# Allegro board legacy_test.brd
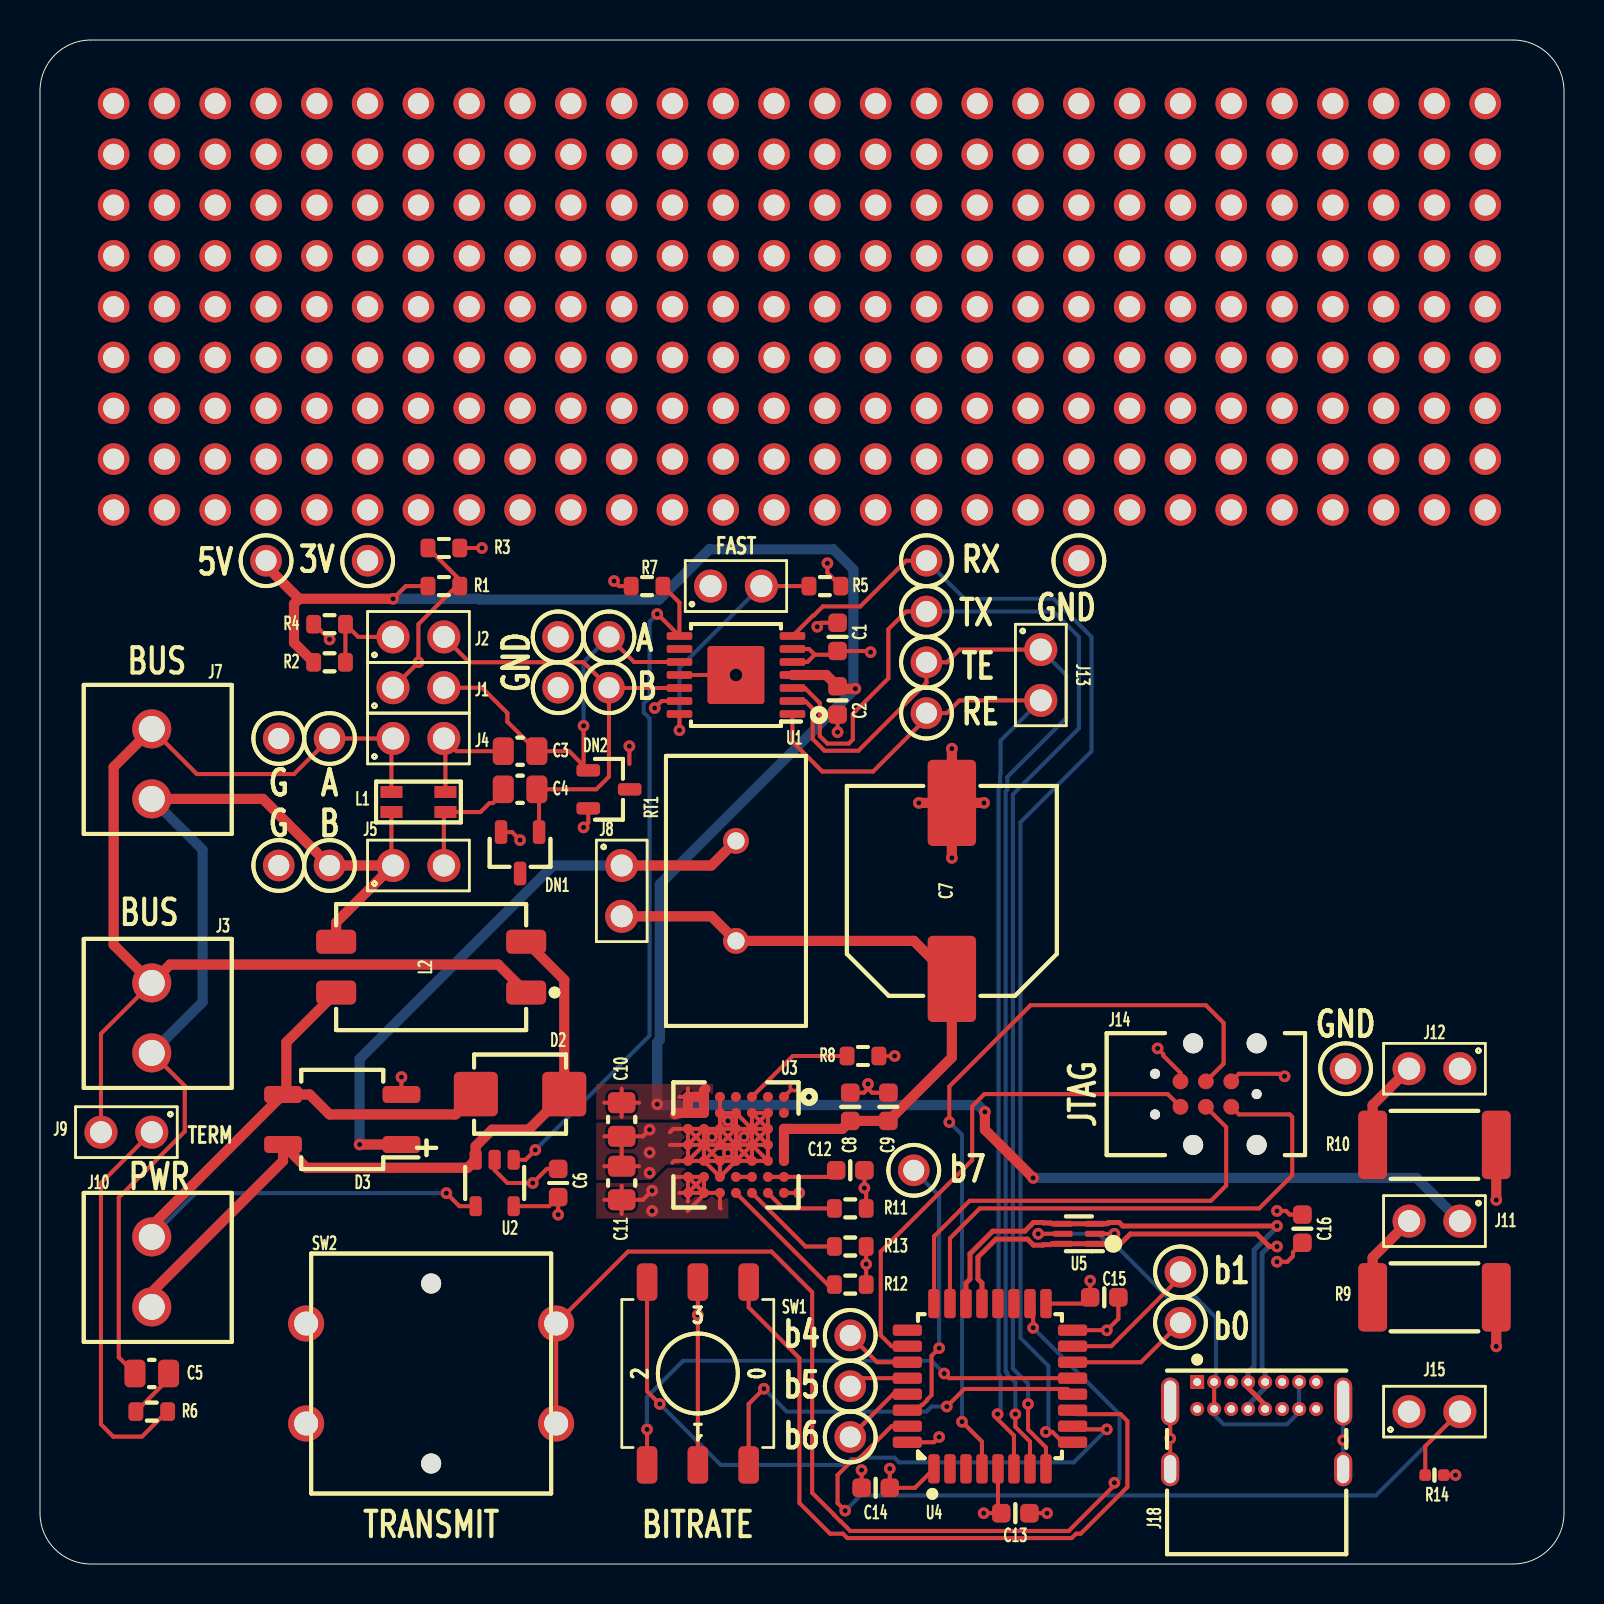
[diagram p0: board, top side]
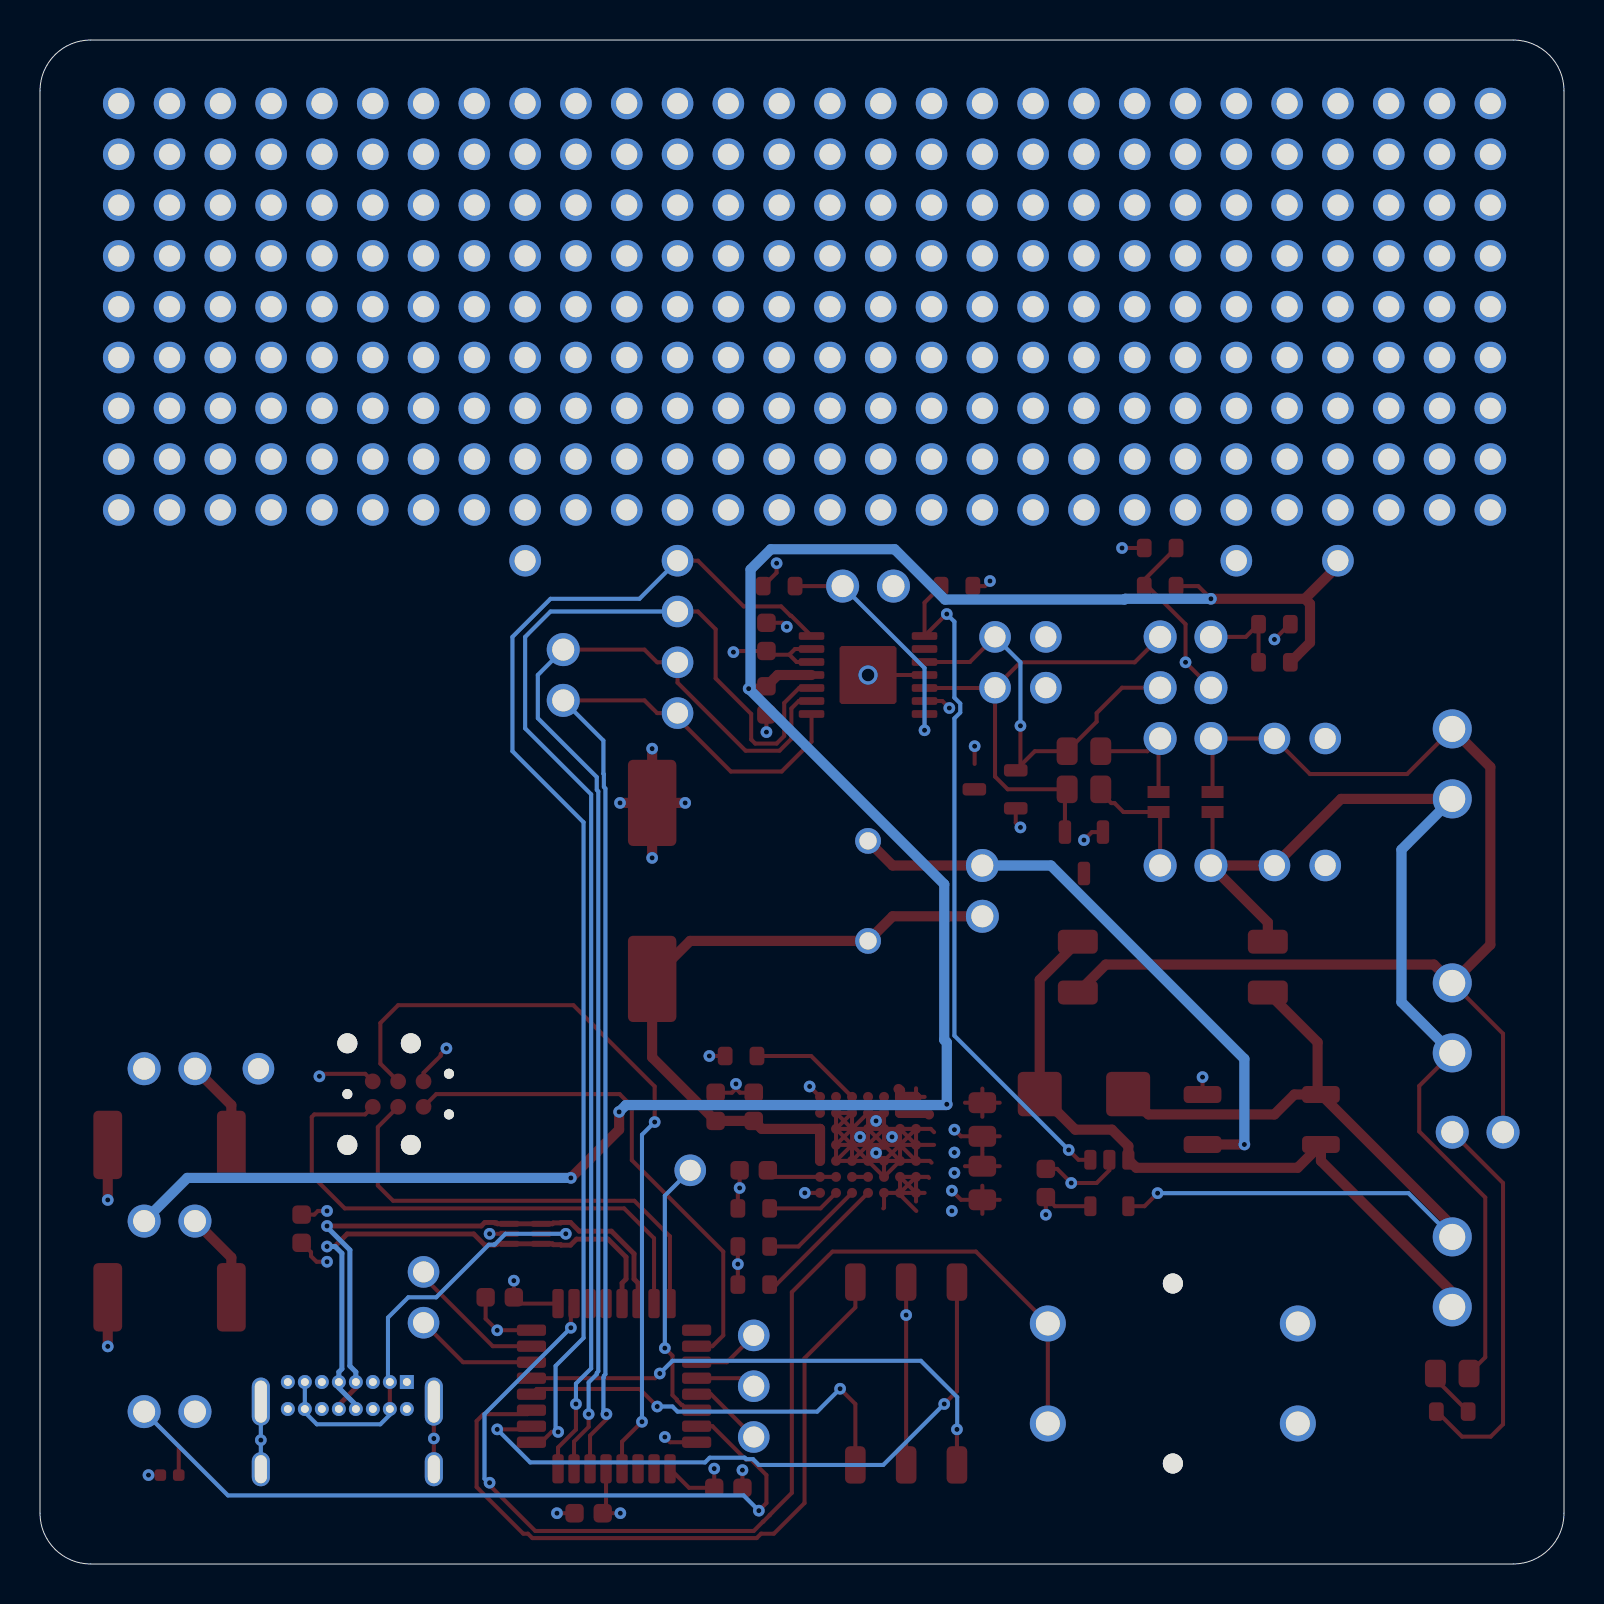
[diagram p1: board, bottom side, seen from below]

Outline 76.2 x 76.2 mm; copper layers: TOP, GPLANE, PPLANE, BOTTOM. Coordinates in mm from the lower left corner of the outline.
Outline path: 0,73.66 arc(0.74,75.46) 2.54,76.2 73.66,76.2 arc(75.46,75.46) 76.2,73.66 76.2,2.54 arc(75.46,0.74) 73.66,0 2.54,0 arc(0.74,0.74) 0,2.54 0,73.66

## Design rules (mm)
constraint set DEFAULT: min track width 0.203
net group USB_DP: nets USB_DM USB_DP

## Placement (name value [footprint] x y rotation side)
C1  0.1uF  [CAPC160X80X90L40N]  39.88 46.36 90 top
C2  0.1uF  [CAPC160X80X90L40N]  39.88 43.18 270 top
C3  1uF  [CAPC200X125X145L50N]  24 40.64 180 top
C4  1uF  [CAPC200X125X145L50N]  24 38.73 180 top
C5  1uF  [CAPC200X125X145L50N]  5.59 9.53 0 top
C6  0.1uF  [CAPC160X80X90L40N]  25.91 19.05 90 top
C7  68uF  [CAPAE1030X1050L350X120N]  45.59 33.66 90 top
C8  1uF  [CAPC160X80X90L40N]  40.51 22.86 90 top
C9  1uF  [CAPC160X80X90L40N]  42.42 22.86 90 top
C10  10uF  [CAPC200X125X145L50N]  29.08 22.23 270 top
C11  22uF  [CAPC200X125X145L50N]  29.08 19.05 90 top
C12  1000pF  [CAPC160X80X90L40N]  40.51 19.68 0 top
C13  0.1uF  [CAPC160X80X90L40N]  48.77 2.54 0 top
C14  0.1uF  [CAPC160X80X90L40N]  41.78 3.81 180 top
C15  0.1uF  [CAPC160X80X90L40N]  53.21 13.34 0 top
C16  0.1uF  [CAPC160X80X90L40N]  63.12 16.76 90 top
D2  SZP6SMB56CAT3G  [DIONM540X362X247L118X208N]  24 23.5 0 top
D3  CDBHM160L-HF  [RECT_SOIC4P250_472X700X270L8-1]  15.11 22.23 90 top
DN1  AZ23C5V1-7-F  [SOT23-3P95_237X111L42X43N]  24 35.56 180 top
DN2  AZ23C5V1-7-F  [SOT23-3P95_237X111L42X43N]  28.45 38.73 270 top
J1  -  [61300211121]  18.92 43.81 0 top
J2  -  [61300211121]  18.92 46.36 0 top
J3  691214110002  [CON_691214110002_WURTH]  5.59 27.3 270 top
J4  -  [61300211121]  18.92 41.27 0 top
J5  -  [61300211121]  18.92 34.92 0 top
J6  -  [61300211121]  34.8 48.9 0 top
J7  691214110002  [CON_691214110002_WURTH]  5.59 40 270 top
J8  -  [61300211121]  29.08 33.66 270 top
J9  -  [61300211121]  4.32 21.59 180 top
J10  691214110002  [CON_691214110002_WURTH]  5.59 14.61 270 top
J11  -  [61300211121]  69.72 17.14 180 top
J12  -  [61300211121]  69.72 24.77 180 top
J13  -  [61300211121]  50.04 44.45 270 top
J14  TC2030  [TAG_TC2030]  58.29 23.5 180 top
J15  -  [61300211121]  69.72 7.62 0 top
J18  USB4085-GF-A  [GCT_USB4085-GF-A]  60.83 5.08 270 top
L1  744232101  [IND_744232101_WURTH]  18.92 38.1 0 top
L2  744222  [IND_744222_WURTH]  19.56 29.84 90 top
NOREF  -  [unnamed]  67.18 73.03 0 top
NOREF#2  -  [unnamed]  13.84 65.41 0 top
NOREF#3  -  [unnamed]  18.92 60.33 0 top
NOREF#4  -  [unnamed]  72.26 57.78 0 top
NOREF#5  -  [unnamed]  57.02 55.24 0 top
NOREF#6  -  [unnamed]  13.84 73.03 0 top
NOREF#7  -  [unnamed]  46.86 67.94 0 top
NOREF#8  -  [unnamed]  46.86 73.03 0 top
NOREF#9  -  [unnamed]  62.1 52.7 0 top
NOREF#10  -  [unnamed]  8.76 52.7 0 top
NOREF#11  -  [unnamed]  44.32 70.48 0 top
NOREF#12  -  [unnamed]  31.62 67.94 0 top
NOREF#13  -  [unnamed]  54.48 57.78 0 top
NOREF#14  -  [unnamed]  57.02 73.03 0 top
NOREF#15  -  [unnamed]  49.4 52.7 0 top
NOREF#16  -  [unnamed]  67.18 70.48 0 top
NOREF#17  -  [unnamed]  3.68 55.24 0 top
NOREF#18  -  [unnamed]  46.86 62.87 0 top
NOREF#19  -  [unnamed]  62.1 73.03 0 top
NOREF#20  -  [unnamed]  36.7 60.33 0 top
NOREF#21  -  [unnamed]  41.78 52.7 0 top
NOREF#22  -  [unnamed]  41.78 70.48 0 top
NOREF#23  -  [unnamed]  8.76 62.87 0 top
NOREF#24  -  [#2]  2.54 0 90 top
NOREF#25  -  [unnamed]  59.56 70.48 0 top
NOREF#26  -  [unnamed]  54.48 70.48 0 top
NOREF#27  -  [#2]  0 2.54 0 top
NOREF#28  -  [unnamed]  6.22 73.03 0 top
NOREF#29  -  [unnamed]  29.08 67.94 0 top
NOREF#30  -  [unnamed]  8.76 60.33 0 top
NOREF#31  -  [unnamed]  8.76 73.03 0 top
NOREF#32  -  [unnamed]  29.08 57.78 0 top
NOREF#33  -  [unnamed]  18.92 65.41 0 top
NOREF#34  -  [unnamed]  3.68 62.87 0 top
NOREF#35  -  [unnamed]  39.24 55.24 0 top
NOREF#36  -  [unnamed]  44.32 62.87 0 top
NOREF#37  -  [unnamed]  36.7 65.41 0 top
NOREF#38  -  [unnamed]  59.56 60.33 0 top
NOREF#39  -  [unnamed]  24 57.78 0 top
NOREF#40  -  [unnamed]  39.24 52.7 0 top
NOREF#41  -  [unnamed]  18.92 73.03 0 top
NOREF#42  -  [unnamed]  59.56 55.24 0 top
NOREF#43  -  [unnamed]  49.4 67.94 0 top
NOREF#44  -  [unnamed]  18.92 57.78 0 top
NOREF#45  -  [unnamed]  54.48 55.24 0 top
NOREF#46  -  [unnamed]  3.68 57.78 0 top
NOREF#47  -  [unnamed]  24 55.24 0 top
NOREF#48  -  [unnamed]  31.62 73.03 0 top
NOREF#49  -  [unnamed]  24 62.87 0 top
NOREF#50  -  [unnamed]  41.78 73.03 0 top
NOREF#51  -  [unnamed]  29.08 73.03 0 top
NOREF#52  -  [unnamed]  49.4 65.41 0 top
NOREF#53  -  [unnamed]  67.18 67.94 0 top
NOREF#54  -  [unnamed]  24 67.94 0 top
NOREF#55  -  [unnamed]  44.32 55.24 0 top
NOREF#56  -  [unnamed]  6.22 67.94 0 top
NOREF#57  -  [unnamed]  16.38 57.78 0 top
NOREF#58  -  [unnamed]  72.26 60.33 0 top
NOREF#59  -  [unnamed]  41.78 55.24 0 top
NOREF#60  -  [unnamed]  13.84 55.24 0 top
NOREF#61  -  [unnamed]  57.02 70.48 0 top
NOREF#62  -  [unnamed]  34.16 67.94 0 top
NOREF#63  -  [unnamed]  16.38 73.03 0 top
NOREF#64  -  [unnamed]  31.62 62.87 0 top
NOREF#65  -  [unnamed]  34.16 65.41 0 top
NOREF#66  -  [unnamed]  69.72 52.7 0 top
NOREF#67  -  [unnamed]  3.68 60.33 0 top
NOREF#68  -  [unnamed]  26.54 70.48 0 top
NOREF#69  -  [unnamed]  8.76 65.41 0 top
NOREF#70  -  [unnamed]  49.4 73.03 0 top
NOREF#71  -  [unnamed]  54.48 60.33 0 top
NOREF#72  -  [unnamed]  24 70.48 0 top
NOREF#73  -  [unnamed]  41.78 65.41 0 top
NOREF#74  -  [unnamed]  26.54 73.03 0 top
NOREF#75  -  [unnamed]  13.84 62.87 0 top
NOREF#76  -  [unnamed]  34.16 60.33 0 top
NOREF#77  -  [unnamed]  21.46 52.7 0 top
NOREF#78  -  [unnamed]  69.72 65.41 0 top
NOREF#79  -  [unnamed]  62.1 55.24 0 top
NOREF#80  -  [unnamed]  51.94 55.24 0 top
NOREF#81  -  [unnamed]  64.64 52.7 0 top
NOREF#82  -  [unnamed]  31.62 57.78 0 top
NOREF#83  -  [unnamed]  13.84 57.78 0 top
NOREF#84  -  [unnamed]  24 60.33 0 top
NOREF#85  -  [unnamed]  67.18 62.87 0 top
NOREF#86  -  [unnamed]  51.94 62.87 0 top
NOREF#87  -  [unnamed]  49.4 70.48 0 top
NOREF#88  -  [unnamed]  59.56 52.7 0 top
NOREF#89  -  [unnamed]  11.3 57.78 0 top
NOREF#90  -  [unnamed]  51.94 70.48 0 top
NOREF#91  -  [unnamed]  41.78 62.87 0 top
NOREF#92  -  [unnamed]  6.22 57.78 0 top
NOREF#93  -  [unnamed]  31.62 52.7 0 top
NOREF#94  -  [unnamed]  29.08 65.41 0 top
NOREF#95  -  [unnamed]  24 73.03 0 top
NOREF#96  -  [unnamed]  67.18 65.41 0 top
NOREF#97  -  [unnamed]  69.72 62.87 0 top
NOREF#98  -  [unnamed]  36.7 52.7 0 top
NOREF#99  -  [unnamed]  64.64 65.41 0 top
NOREF#100  -  [unnamed]  26.54 52.7 0 top
NOREF#101  -  [unnamed]  46.86 57.78 0 top
NOREF#102  -  [unnamed]  69.72 73.03 0 top
NOREF#103  -  [unnamed]  46.86 65.41 0 top
NOREF#104  -  [unnamed]  3.68 67.94 0 top
NOREF#105  -  [unnamed]  16.38 52.7 0 top
NOREF#106  -  [unnamed]  57.02 62.87 0 top
NOREF#107  -  [unnamed]  44.32 52.7 0 top
NOREF#108  -  [unnamed]  57.02 60.33 0 top
NOREF#109  -  [unnamed]  64.64 70.48 0 top
NOREF#110  -  [unnamed]  44.32 57.78 0 top
NOREF#111  -  [unnamed]  36.7 62.87 0 top
NOREF#112  -  [unnamed]  46.86 70.48 0 top
NOREF#113  -  [unnamed]  51.94 60.33 0 top
NOREF#114  -  [unnamed]  69.72 55.24 0 top
NOREF#115  -  [unnamed]  62.1 60.33 0 top
NOREF#116  -  [unnamed]  62.1 57.78 0 top
NOREF#117  -  [unnamed]  64.64 57.78 0 top
NOREF#118  -  [unnamed]  69.72 60.33 0 top
NOREF#119  -  [unnamed]  6.22 55.24 0 top
NOREF#120  -  [unnamed]  54.48 52.7 0 top
NOREF#121  -  [unnamed]  13.84 52.7 0 top
NOREF#122  -  [unnamed]  31.62 60.33 0 top
NOREF#123  -  [unnamed]  26.54 60.33 0 top
NOREF#124  -  [unnamed]  57.02 57.78 0 top
NOREF#125  -  [unnamed]  24 52.7 0 top
NOREF#126  -  [unnamed]  29.08 62.87 0 top
NOREF#127  -  [unnamed]  67.18 60.33 0 top
NOREF#128  -  [unnamed]  18.92 70.48 0 top
NOREF#129  -  [unnamed]  34.16 70.48 0 top
NOREF#130  -  [unnamed]  54.48 65.41 0 top
NOREF#131  -  [unnamed]  31.62 70.48 0 top
NOREF#132  -  [unnamed]  39.24 70.48 0 top
NOREF#133  -  [unnamed]  62.1 65.41 0 top
NOREF#134  -  [unnamed]  72.26 70.48 0 top
NOREF#135  -  [unnamed]  62.1 70.48 0 top
NOREF#136  -  [unnamed]  72.26 62.87 0 top
NOREF#137  -  [unnamed]  72.26 55.24 0 top
NOREF#138  -  [unnamed]  13.84 67.94 0 top
NOREF#139  -  [unnamed]  11.3 67.94 0 top
NOREF#140  -  [unnamed]  59.56 62.87 0 top
NOREF#141  -  [unnamed]  51.94 73.03 0 top
NOREF#142  -  [unnamed]  51.94 52.7 0 top
NOREF#143  -  [unnamed]  21.46 57.78 0 top
NOREF#144  -  [unnamed]  69.72 70.48 0 top
NOREF#145  -  [unnamed]  21.46 55.24 0 top
NOREF#146  -  [unnamed]  18.92 52.7 0 top
NOREF#147  -  [unnamed]  6.22 65.41 0 top
NOREF#148  -  [unnamed]  72.26 65.41 0 top
NOREF#149  -  [unnamed]  67.18 55.24 0 top
NOREF#150  -  [unnamed]  31.62 65.41 0 top
NOREF#151  -  [unnamed]  39.24 60.33 0 top
NOREF#152  -  [unnamed]  6.22 52.7 0 top
NOREF#153  -  [unnamed]  18.92 67.94 0 top
NOREF#154  -  [unnamed]  34.16 73.03 0 top
NOREF#155  -  [unnamed]  16.38 55.24 0 top
NOREF#156  -  [unnamed]  16.38 65.41 0 top
NOREF#157  -  [unnamed]  62.1 67.94 0 top
NOREF#158  -  [unnamed]  64.64 73.03 0 top
NOREF#159  -  [unnamed]  69.72 57.78 0 top
NOREF#160  -  [unnamed]  31.62 55.24 0 top
NOREF#161  -  [unnamed]  49.4 57.78 0 top
NOREF#162  -  [unnamed]  11.3 73.03 0 top
NOREF#163  -  [unnamed]  6.22 62.87 0 top
NOREF#164  -  [unnamed]  36.7 73.03 0 top
NOREF#165  -  [unnamed]  41.78 60.33 0 top
NOREF#166  -  [unnamed]  6.22 60.33 0 top
NOREF#167  -  [unnamed]  59.56 73.03 0 top
NOREF#168  -  [unnamed]  54.48 73.03 0 top
NOREF#169  -  [unnamed]  44.32 73.03 0 top
NOREF#170  -  [unnamed]  26.54 62.87 0 top
NOREF#171  -  [unnamed]  39.24 62.87 0 top
NOREF#172  -  [unnamed]  64.64 55.24 0 top
NOREF#173  -  [unnamed]  36.7 57.78 0 top
NOREF#174  -  [unnamed]  26.54 55.24 0 top
NOREF#175  -  [unnamed]  46.86 60.33 0 top
NOREF#176  -  [unnamed]  26.54 57.78 0 top
NOREF#177  -  [unnamed]  21.46 60.33 0 top
NOREF#178  -  [unnamed]  34.16 55.24 0 top
NOREF#179  -  [unnamed]  39.24 57.78 0 top
NOREF#180  -  [unnamed]  64.64 60.33 0 top
NOREF#181  -  [unnamed]  64.64 67.94 0 top
NOREF#182  -  [unnamed]  29.08 55.24 0 top
NOREF#183  -  [unnamed]  44.32 67.94 0 top
NOREF#184  -  [unnamed]  67.18 52.7 0 top
NOREF#185  -  [unnamed]  21.46 73.03 0 top
NOREF#186  -  [unnamed]  8.76 57.78 0 top
NOREF#187  -  [unnamed]  11.3 62.87 0 top
NOREF#188  -  [unnamed]  64.64 62.87 0 top
NOREF#189  -  [unnamed]  11.3 70.48 0 top
NOREF#190  -  [unnamed]  62.1 62.87 0 top
NOREF#191  -  [unnamed]  46.86 52.7 0 top
NOREF#192  -  [unnamed]  16.38 60.33 0 top
NOREF#193  -  [unnamed]  8.76 70.48 0 top
NOREF#194  -  [unnamed]  44.32 65.41 0 top
NOREF#195  -  [unnamed]  29.08 70.48 0 top
NOREF#196  -  [unnamed]  36.7 70.48 0 top
NOREF#197  -  [unnamed]  3.68 52.7 0 top
NOREF#198  -  [unnamed]  57.02 52.7 0 top
NOREF#199  -  [unnamed]  51.94 67.94 0 top
NOREF#200  -  [unnamed]  34.16 62.87 0 top
NOREF#201  -  [unnamed]  3.68 73.03 0 top
NOREF#202  -  [unnamed]  24 65.41 0 top
NOREF#203  -  [unnamed]  59.56 57.78 0 top
NOREF#204  -  [unnamed]  16.38 67.94 0 top
NOREF#205  -  [unnamed]  49.4 60.33 0 top
NOREF#206  -  [unnamed]  39.24 65.41 0 top
NOREF#207  -  [unnamed]  36.7 55.24 0 top
NOREF#208  -  [unnamed]  59.56 65.41 0 top
NOREF#209  -  [unnamed]  36.7 67.94 0 top
NOREF#210  -  [unnamed]  29.08 52.7 0 top
NOREF#211  -  [unnamed]  69.72 67.94 0 top
NOREF#212  -  [unnamed]  54.48 67.94 0 top
NOREF#213  -  [unnamed]  8.76 67.94 0 top
NOREF#214  -  [unnamed]  11.3 52.7 0 top
NOREF#215  -  [unnamed]  21.46 65.41 0 top
NOREF#216  -  [unnamed]  18.92 55.24 0 top
NOREF#217  -  [unnamed]  21.46 62.87 0 top
NOREF#218  -  [unnamed]  46.86 55.24 0 top
NOREF#219  -  [unnamed]  51.94 57.78 0 top
NOREF#220  -  [unnamed]  34.16 57.78 0 top
NOREF#221  -  [unnamed]  49.4 55.24 0 top
NOREF#222  -  [unnamed]  8.76 55.24 0 top
NOREF#223  -  [unnamed]  72.26 67.94 0 top
NOREF#224  -  [unnamed]  11.3 55.24 0 top
NOREF#225  -  [unnamed]  13.84 70.48 0 top
NOREF#226  -  [unnamed]  26.54 65.41 0 top
NOREF#227  -  [unnamed]  72.26 73.03 0 top
NOREF#228  -  [unnamed]  41.78 67.94 0 top
NOREF#229  -  [unnamed]  13.84 60.33 0 top
NOREF#230  -  [unnamed]  34.16 52.7 0 top
NOREF#231  -  [unnamed]  16.38 62.87 0 top
NOREF#232  -  [unnamed]  26.54 67.94 0 top
NOREF#233  -  [unnamed]  72.26 52.7 0 top
NOREF#234  -  [unnamed]  6.22 70.48 0 top
NOREF#235  -  [unnamed]  3.68 70.48 0 top
NOREF#236  -  [unnamed]  57.02 67.94 0 top
NOREF#237  -  [unnamed]  16.38 70.48 0 top
NOREF#238  -  [unnamed]  59.56 67.94 0 top
NOREF#239  -  [unnamed]  51.94 65.41 0 top
NOREF#240  -  [unnamed]  39.24 67.94 0 top
NOREF#241  -  [unnamed]  11.3 60.33 0 top
NOREF#242  -  [unnamed]  29.08 60.33 0 top
NOREF#243  -  [unnamed]  3.68 65.41 0 top
NOREF#244  -  [unnamed]  21.46 70.48 0 top
NOREF#245  -  [unnamed]  21.46 67.94 0 top
NOREF#246  -  [unnamed]  41.78 57.78 0 top
NOREF#247  -  [unnamed]  44.32 60.33 0 top
NOREF#248  -  [unnamed]  54.48 62.87 0 top
NOREF#249  -  [unnamed]  11.3 65.41 0 top
NOREF#250  -  [unnamed]  49.4 62.87 0 top
NOREF#251  -  [unnamed]  57.02 65.41 0 top
NOREF#252  -  [unnamed]  67.18 57.78 0 top
NOREF#253  -  [unnamed]  18.92 62.87 0 top
NOREF#254  -  [unnamed]  39.24 73.03 0 top
R1  100k  [RESC160X80X55L25N]  20.19 48.9 0 top
R2  100k  [RESC160X80X55L25N]  14.48 45.09 0 top
R3  100k  [RESC160X80X55L25N]  20.19 50.8 0 top
R4  100k  [RESC160X80X55L25N]  14.48 46.99 180 top
R5  47k  [RESC160X80X55L25N]  39.24 48.9 0 top
R6  120  [RESC160X80X55L25N]  5.59 7.62 0 top
R7  47k  [RESC160X80X55L25N]  30.35 48.9 0 top
R8  0  [RESC160X80X55L25N]  41.15 25.4 0 top
R9  22  [RESC640X320X70L65N]  69.72 13.34 0 top
R10  10Ohms  [RESC640X320X70L65N]  69.72 20.95 0 top
R11  35.7k  [RESC160X80X55L25N]  40.51 17.78 0 top
R12  47.5k  [RESC160X80X55L25N]  40.51 13.97 0 top
R13  78.7k  [RESC160X80X55L25N]  40.51 15.88 0 top
R14  47k  [RESC100X50X40L25N]  69.72 4.45 0 top
RT1  PTCEL13R501RBE  [THRMRB500W60L1350T700H1700]  34.8 33.66 270 top
SW1  CS-7-14TB  [SW_CS-7-14TB_NIDEC]  32.89 9.53 0 top
SW2  B3F-5000  [SW_B3F-5000_OMRON]  19.56 9.53 0 top
TP1  BLU  [CON_5117_KEYSTONE]  44.32 47.62 0 top
TP2  BLU  [CON_5117_KEYSTONE]  44.32 42.55 0 top
TP3  BLU  [CON_5117_KEYSTONE]  44.32 45.09 0 top
TP4  WHT  [CON_5002_KEYSTONE]  28.45 46.36 0 top
TP5  YEL  [CON_5004_KEYSTONE]  28.45 43.81 0 top
TP6  WHT  [CON_5002_KEYSTONE]  14.48 41.27 0 top
TP7  YEL  [CON_5004_KEYSTONE]  14.48 34.92 0 top
TP8  BLU  [CON_5117_KEYSTONE]  44.32 50.16 0 top
TP9  BLK  [CON_5001_KEYSTONE]  11.94 34.92 0 top
TP10  BLK  [CON_5001_KEYSTONE]  11.94 41.27 0 top
TP11  BLK  [CON_5001_KEYSTONE]  25.91 46.36 0 top
TP12  BLK  [CON_5001_KEYSTONE]  65.28 24.77 0 top
TP13  BLK  [CON_5001_KEYSTONE]  51.94 50.16 0 top
TP14  BLK  [CON_5001_KEYSTONE]  25.91 43.81 0 top
TP15  RED  [CON_5000_KEYSTONE]  11.3 50.16 0 top
TP16  RED  [CON_5000_KEYSTONE]  16.38 50.16 0 top
TP17  BLU  [CON_5117_KEYSTONE]  57.02 12.06 0 top
TP18  BLU  [CON_5117_KEYSTONE]  57.02 14.61 0 top
TP19  BLU  [CON_5117_KEYSTONE]  40.51 11.43 0 top
TP20  BLU  [CON_5117_KEYSTONE]  40.51 8.89 0 top
TP21  BLU  [CON_5117_KEYSTONE]  40.51 6.35 0 top
TP22  BLU  [CON_5117_KEYSTONE]  43.69 19.68 0 top
U1  MAX13451EAUD+T  [SOP15P65_500X637X110L60X24T2-1]  34.8 44.45 90 top
U2  LT1716IS5#TRMPBF  [SOT23-5P95_280X100L40X40N]  22.73 19.05 180 top
U3  LTM8078IY#PBF  [LGA49CP80_7X7_625X625X242L50N]  34.8 20.95 180 top
U4  STM32L412KBT6  [QFP32P80_900X900X160L60X37N]  47.5 8.89 0 top
U5  USBLC6-2P6  [DIOSOFL6P50_160X160X60L40X26]  51.94 16.51 90 top

## Library data of the parts
C1-C6 C8-C16 = CAP_SHORT
C7 = CAP_POL_SHORT
D2 = DIODE TVS BI-DIR
D3 = BRIDGE_SHKY_12
DN1 DN2 = DIODE_DUAL_ZENER_CA_KKJ
J1 J2 J4-J6 J8 J9 J11-J13 J15 = JUMP 1x2
J3 J7 J10 = HEADER 2
J14 = CON6
J18 = CON_USB4085_GCT
L1 = CHOKE CM14
L2 = CHOKE CM12
R1-R14 = RES
RT1 = PTC
SW1 = SW_CS-7-14TB_NIDEC
SW2 = SW_PB_4PIN
TP1-TP22 = TEST HOLE
U1 = IC_MAX13451_MAXIM
U2 = IC_LT1716_AD
U3 = IC_LTM8078_AD
U4 = IC_STM32L412KB_ST
U5 = IC_USBLC6-2_ST

## Footprints (pads in the part's own frame, mm; a bottom-side part is the same pattern mirrored in y, then rotated)
61300211121
  round 1.65 hole 1.1: 1(-1.27,0) 2(1.27,0)
CAPAE1030X1050L350X120N
  rrect 4.31x2.42 smd: 1(-4.4,0) 2(4.4,0)
CAPC160X80X90L40N
  rrect 0.92x0.93 smd: 1(-0.705,0) 2(0.705,0)
CAPC200X125X145L50N
  rrect 1.05x1.38 smd: 1(-0.84,0) 2(0.84,0)
CON_5000_KEYSTONE
  round 1.58 hole 1.05: 1(0,0)
CON_5001_KEYSTONE
  round 1.58 hole 1.05: 1(0,0)
CON_5002_KEYSTONE
  round 1.58 hole 1.05: 1(0,0)
CON_5004_KEYSTONE
  round 1.58 hole 1.05: 1(0,0)
CON_5117_KEYSTONE
  round 1.58 hole 1.05: 1(0,0)
CON_691214110002_WURTH
  round 1.95 hole 1.3: 1(-1.75,0) 2(1.75,0)
DIONM540X362X247L118X208N
  rrect 2.2x2.22 smd: 1(-2.21,0) 2(2.21,0)
DIOSOFL6P50_160X160X60L40X26
  rrect 0.3x0.99 smd: 1(-0.5,-0.805) 2(0,-0.805) 3(0.5,-0.805) 4(0.5,0.805) 5(0,0.805) 6(-0.5,0.805)
GCT_USB4085-GF-A
  oval 2.405x0.905 hole 2.1x0.6 unplated: (-3.04,4.325) (-3.04,-4.325)
  oval 1.705x0.905 hole 1.4x0.6 unplated: (0.34,4.325) (0.34,-4.325)
  rect 0.697x0.697 hole 0.393: A1(-4.02,-2.975)
  round 0.697 hole 0.393: A4(-4.02,-2.125) A5(-4.02,-1.275) A6(-4.02,-0.425) A7(-4.02,0.425) A8(-4.02,1.275) A9(-4.02,2.125) A12(-4.02,2.975) B1(-2.67,2.975) B4(-2.67,2.125) B5(-2.67,1.275) B6(-2.67,0.425) B7(-2.67,-0.425) B8(-2.67,-1.275) B9(-2.67,-2.125) B12(-2.67,-2.975)
IND_744222_WURTH
  rrect 1.2x2 smd: 1(-1.27,-4.75) 2(1.27,-4.75) 3(1.27,4.75) 4(-1.27,4.75)
IND_744232101_WURTH
  rect 1.1x0.6 smd: 1(-1.35,0.5) 2(1.35,0.5) 3(1.35,-0.5) 4(-1.35,-0.5)
LGA49CP80_7X7_625X625X242L50N
  round 0.5 smd: A1(-2.4,-2.4) A2(-2.4,-1.6) A3(-2.4,-0.8) A4(-2.4,0) A5(-2.4,0.8) A6(-2.4,1.6) A7(-2.4,2.4) B1(-1.6,-2.4) B2(-1.6,-1.6) B3(-1.6,-0.8) B4(-1.6,0) B5(-1.6,0.8) B6(-1.6,1.6) B7(-1.6,2.4) C1(-0.8,-2.4) C2(-0.8,-1.6) C3(-0.8,-0.8) C4(-0.8,0) C5(-0.8,0.8) C6(-0.8,1.6) C7(-0.8,2.4) D1(0,-2.4) D2(0,-1.6) D3(0,-0.8) D4(0,0) D5(0,0.8) D6(0,1.6) D7(0,2.4) E1(0.8,-2.4) E2(0.8,-1.6) E3(0.8,-0.8) E4(0.8,0) E5(0.8,0.8) E6(0.8,1.6) E7(0.8,2.4) F1(1.6,-2.4) F2(1.6,-1.6) F3(1.6,-0.8) F4(1.6,0) F5(1.6,0.8) F6(1.6,1.6) F7(1.6,2.4) G1(2.4,-2.4) G2(2.4,-1.6) G3(2.4,-0.8) G4(2.4,0) G5(2.4,0.8) G6(2.4,1.6) G7(2.4,2.4)
QFP32P80_900X900X160L60X37N
  rrect 0.57x1.46 smd: 1(-2.8,-4.13) 2(-2,-4.13) 3(-1.2,-4.13) 4(-0.4,-4.13) 5(0.4,-4.13) 6(1.2,-4.13) 7(2,-4.13) 8(2.8,-4.13) 17(2.8,4.13) 18(2,4.13) 19(1.2,4.13) 20(0.4,4.13) 21(-0.4,4.13) 22(-1.2,4.13) 23(-2,4.13) 24(-2.8,4.13)
  rrect 1.46x0.57 smd: 9(4.13,-2.8) 10(4.13,-2) 11(4.13,-1.2) 12(4.13,-0.4) 13(4.13,0.4) 14(4.13,1.2) 15(4.13,2) 16(4.13,2.8) 25(-4.13,2.8) 26(-4.13,2) 27(-4.13,1.2) 28(-4.13,0.4) 29(-4.13,-0.4) 30(-4.13,-1.2) 31(-4.13,-2) 32(-4.13,-2.8)
RECT_SOIC4P250_472X700X270L8-1
  rrect 0.85x1.89 smd: 1(-1.25,-2.96) 2(1.25,-2.96) 3(1.25,2.96) 4(-1.25,2.96)
RESC100X50X40L25N
  rrect 0.58x0.58 smd: 1(-0.46,0) 2(0.46,0)
RESC160X80X55L25N
  rrect 0.74x0.93 smd: 1(-0.795,0) 2(0.795,0)
RESC640X320X70L65N
  rrect 1.44x3.42 smd: 1(-3.09,0) 2(3.09,0)
SOP15P65_500X637X110L60X24T2-1
  rrect 0.39x1.28 smd: 1(-1.95,-2.825) 2(-1.3,-2.825) 3(-0.65,-2.825) 4(0,-2.825) 5(0.65,-2.825) 6(1.3,-2.825) 7(1.95,-2.825) 8(1.95,2.825) 9(1.3,2.825) 10(0.65,2.825) 11(0,2.825) 12(-0.65,2.825) 13(-1.3,2.825) 14(-1.95,2.825)
  rrect 2.9x2.85 smd: 15(0,0)
SOT23-3P95_237X111L42X43N
  rrect 0.62x1.18 smd: 1(-0.95,-1.035) 2(0.95,-1.035) 3(0,1.035)
SOT23-5P95_280X100L40X40N
  rrect 0.61x0.99 smd: 1(-0.95,-1.16) 2(0,-1.16) 3(0.95,-1.16) 4(0.95,1.16) 5(-0.95,1.16)
SW_B3F-5000_OMRON
  round 1 hole 1.8 unplated: (0,4.5) (0,-4.5)
  round 1.8 hole 1.2: 1(-6.25,2.5) 2(6.25,2.5) 3(-6.25,-2.5) 4(6.25,-2.5)
SW_CS-7-14TB_NIDEC
  rrect 1.03x1.87 smd: 1(-2.54,-4.57) 2(0,-4.57) 3(2.54,-4.57) 4(2.54,4.57) 5(0,4.57) 6(-2.54,4.57)
TAG_TC2030
  round 1 hole 2.38 unplated: (-2.54,2.54) (-2.54,-2.54) (0.635,2.54) (0.635,-2.54)
  round 0.5 hole 0.99 unplated: (-2.54,0) (2.54,1.016) (2.54,-1.016)
  round 0.787 smd: 1(-1.27,-0.635) 2(-1.27,0.635) 3(0,-0.635) 4(0,0.635) 5(1.27,-0.635) 6(1.27,0.635)
THRMRB500W60L1350T700H1700
  round 1.29 hole 0.86: 1(-2.5,0) 2(2.5,0)
unnamed
  round 1.58 hole 1.05: 1(0,0)

## Nets
GND: C1.2 C2.2 C6.2 C7.2 C8.2 C9.2 C10.2 C11.2 C12.2 C13.2 C14.2 C15.2 C16.2 D3.2 DN1.2 DN2.2 J6.1 J14.5 J18.A1 J18.A12 J18.B1 J18.B12 R3.2 R4.2 R9.2 R10.2 R11.2 R12.2 R13.2 R14.2 SW1.2 SW1.5(C_2) SW2.1 SW2.3 TP9.1 TP10.1 TP11.1 TP12.1 TP13.1 TP14.1 U1.11 U1.15 U2.2 U3.A1 U3.A7 U3.B2 U3.B3 U3.B4 U3.B5 U3.C2 U3.C3 U3.C4 U3.C5 U3.D2 U3.D3 U3.D4 U3.D5 U3.E1 U3.E2 U3.E3 U3.E4 U3.E5 U3.E6 U3.F3 U3.F4 U3.F5 U3.G3 U3.G4 U3.G5 U4.16 U4.32 U5.2
V5: C2.1 C10.1 J11.1 R1.1 R2.1 TP15.1 U1.4(VDRV) U3.F1 U3.F2 U3.G1 U3.G2
VCC: C1.1 C6.1 C11.1 C13.1 C14.1 C15.1 C16.1 J12.1 J14.1 J15.1 R5.2 R7.1 R8.2 TP16.1 U1.5 U1.6 U1.13 U2.5 U3.E7 U3.F6 U3.F7 U3.G6 U3.G7 U4.1 U4.5 U4.17
A_IN: C3.1 DN2.1 J1.2 TP4.1 U1.10
B_IN: C4.1 DN1.1 J2.2 TP5.1 U1.12
BUS_A: J3.1 J4.1 J7.1 J9.2 L1.1 L2.1 TP6.1
BUS_B: C5.1 J3.2 J5.1 J7.2 L1.4 L2.3 TP7.1
INV: R7.2 U1.8 U2.1(OUT)
RXD: TP8.1 U1.7 U4.9
RXE: J13.2 TP2.1 U1.1 U4.6
SW1: SW1.6 U4.10
SW2: SW1.4 U4.11
SW3: SW1.3 U4.12
SW4: SW1.1 U4.13
TXD: TP1.1 U1.3 U4.8
TXE: J13.1 TP3.1 U1.2 U4.7
USB_DM: J18.A7 J18.B7 U4.21 U5.1 U5.6
USB_DP: J18.A6 J18.B6 U4.22 U5.3 U5.4
VRAW: C7.1 C8.1 C9.1 J8.2 RT1.2 U3.A3 U3.A4 U3.A5
XMIT: SW2.2 SW2.4 U4.18
N00354: R12.1 U3.D7
N00391: R13.1 U3.C7
N00494: C12.1 U3.A6 U3.B6
N00628: R11.1 U3.B7
N06582: U3.C6 U3.D6(OMC)
N44102: D2.2 D3.4 J10.2 L2.2 U2.3
N44111: D2.1 D3.3(AC2) J10.1 L2.4 U2.4
N44224: D3.1 J8.1 RT1.1
N46803: J6.2 R5.1 U1.14
N47498: J2.1 R2.2 R4.1
N47631: J1.1 R1.2 R3.1
N50317: J11.2 R9.1
N50410: J12.2 R10.1
N62411: C4.2 J5.2 L1.3
N62421: C3.2 J4.2 L1.2
N63315: C5.2 R6.1
N63319: J9.1 R6.2
N73563: R8.1 U3.C1
N86511: J14.2 U4.23
N86521: J14.3 U4.4
N86531: J14.4 U4.24
N86555: J14.6 U4.26(SWO)
N86603: J15.2 R14.1 U4.31
N95055: J18.A4 J18.A9 J18.B4 J18.B9 U5.5(VB)
N97303: TP22.1 U4.30
N97309: TP21.1 U4.29
N97315: TP20.1 U4.28
N97321: TP19.1 U4.27
N97327: TP18.1 U4.15
N97333: TP17.1 U4.14

Pads without a net: DN1 3; DN2 3; J18 A5 A8 B5 B8; NOREF 1; NOREF#2 1; NOREF#3 1; NOREF#4 1; NOREF#5 1; NOREF#6 1; NOREF#7 1; NOREF#8 1; NOREF#9 1; NOREF#10 1; NOREF#11 1; NOREF#12 1; NOREF#13 1; NOREF#14 1; NOREF#15 1; NOREF#16 1; NOREF#17 1; NOREF#18 1; NOREF#19 1; NOREF#20 1; NOREF#21 1; NOREF#22 1; NOREF#23 1; NOREF#25 1; NOREF#26 1; NOREF#28 1; NOREF#29 1; NOREF#30 1; NOREF#31 1; NOREF#32 1; NOREF#33 1; NOREF#34 1; NOREF#35 1; NOREF#36 1; NOREF#37 1; NOREF#38 1; NOREF#39 1; NOREF#40 1; NOREF#41 1; NOREF#42 1; NOREF#43 1; NOREF#44 1; NOREF#45 1; NOREF#46 1; NOREF#47 1; NOREF#48 1; NOREF#49 1; NOREF#50 1; NOREF#51 1; NOREF#52 1; NOREF#53 1; NOREF#54 1; NOREF#55 1; NOREF#56 1; NOREF#57 1; NOREF#58 1; NOREF#59 1; NOREF#60 1; NOREF#61 1; NOREF#62 1; NOREF#63 1; NOREF#64 1; NOREF#65 1; NOREF#66 1; NOREF#67 1; NOREF#68 1; NOREF#69 1; NOREF#70 1; NOREF#71 1; NOREF#72 1; NOREF#73 1; NOREF#74 1; NOREF#75 1; NOREF#76 1; NOREF#77 1; NOREF#78 1; NOREF#79 1; NOREF#80 1; NOREF#81 1; NOREF#82 1; NOREF#83 1; NOREF#84 1; NOREF#85 1; NOREF#86 1; NOREF#87 1; NOREF#88 1; NOREF#89 1; NOREF#90 1; NOREF#91 1; NOREF#92 1; NOREF#93 1; NOREF#94 1; NOREF#95 1; NOREF#96 1; NOREF#97 1; NOREF#98 1; NOREF#99 1; NOREF#100 1; NOREF#101 1; NOREF#102 1; NOREF#103 1; NOREF#104 1; NOREF#105 1; NOREF#106 1; NOREF#107 1; NOREF#108 1; NOREF#109 1; NOREF#110 1; NOREF#111 1; NOREF#112 1; NOREF#113 1; NOREF#114 1; NOREF#115 1; NOREF#116 1; NOREF#117 1; NOREF#118 1; NOREF#119 1; NOREF#120 1; NOREF#121 1; NOREF#122 1; NOREF#123 1; NOREF#124 1; NOREF#125 1; NOREF#126 1; NOREF#127 1; NOREF#128 1; NOREF#129 1; NOREF#130 1; NOREF#131 1; NOREF#132 1; NOREF#133 1; NOREF#134 1; NOREF#135 1; NOREF#136 1; NOREF#137 1; NOREF#138 1; NOREF#139 1; NOREF#140 1; NOREF#141 1; NOREF#142 1; NOREF#143 1; NOREF#144 1; NOREF#145 1; NOREF#146 1; NOREF#147 1; NOREF#148 1; NOREF#149 1; NOREF#150 1; NOREF#151 1; NOREF#152 1; NOREF#153 1; NOREF#154 1; NOREF#155 1; NOREF#156 1; NOREF#157 1; NOREF#158 1; NOREF#159 1; NOREF#160 1; NOREF#161 1; NOREF#162 1; NOREF#163 1; NOREF#164 1; NOREF#165 1; NOREF#166 1; NOREF#167 1; NOREF#168 1; NOREF#169 1; NOREF#170 1; NOREF#171 1; NOREF#172 1; NOREF#173 1; NOREF#174 1; NOREF#175 1; NOREF#176 1; NOREF#177 1; NOREF#178 1; NOREF#179 1; NOREF#180 1; NOREF#181 1; NOREF#182 1; NOREF#183 1; NOREF#184 1; NOREF#185 1; NOREF#186 1; NOREF#187 1; NOREF#188 1; NOREF#189 1; NOREF#190 1; NOREF#191 1; NOREF#192 1; NOREF#193 1; NOREF#194 1; NOREF#195 1; NOREF#196 1; NOREF#197 1; NOREF#198 1; NOREF#199 1; NOREF#200 1; NOREF#201 1; NOREF#202 1; NOREF#203 1; NOREF#204 1; NOREF#205 1; NOREF#206 1; NOREF#207 1; NOREF#208 1; NOREF#209 1; NOREF#210 1; NOREF#211 1; NOREF#212 1; NOREF#213 1; NOREF#214 1; NOREF#215 1; NOREF#216 1; NOREF#217 1; NOREF#218 1; NOREF#219 1; NOREF#220 1; NOREF#221 1; NOREF#222 1; NOREF#223 1; NOREF#224 1; NOREF#225 1; NOREF#226 1; NOREF#227 1; NOREF#228 1; NOREF#229 1; NOREF#230 1; NOREF#231 1; NOREF#232 1; NOREF#233 1; NOREF#234 1; NOREF#235 1; NOREF#236 1; NOREF#237 1; NOREF#238 1; NOREF#239 1; NOREF#240 1; NOREF#241 1; NOREF#242 1; NOREF#243 1; NOREF#244 1; NOREF#245 1; NOREF#246 1; NOREF#247 1; NOREF#248 1; NOREF#249 1; NOREF#250 1; NOREF#251 1; NOREF#252 1; NOREF#253 1; NOREF#254 1; U1 9; U3 A2 B1 D1; U4 2 3 19 20 25

## Via types
v1: diameter 0.584, hole 0.254, TOP to BOTTOM, 82 vias
v2: diameter 0.965, hole 0.635, TOP to BOTTOM, 1 via

## Routing (per net, layer and track width the routed paths; a pad name or vN(x,y) marks a point on that pad's centre or on a via; arc(x,y) is an arc through that point)
GND: length 167.1
  TOP w0.203: v1(30.48,21.72) 30.15,21.39 C10.2 ; v1(34.4,22.15) U3.D2 ; U3.D2 U3.D3 ; U3.D2 U3.E2 ; U3.D2 U3.C3 ; U3.D2 U3.D3 ; U3.G3 U3.G4 ; U3.G3 U3.F4 ; U3.G3 U3.F3 ; U3.G3 31.66,21.76 31.5,21.59 ; U3.G4 U3.F3 ; U3.G4 U3.F4 ; U3.G4 31.5,20.95 ; U3.G4 U3.G5 ; U3.A1 v1(37.72,23.88) ; U3.F3 U3.F4 ; U3.F3 v1(33.6,21.35) ; U3.F3 U3.E3 ; C9.2 41.61,23.57 41.4,23.77 ; v1(44.96,6.35) 44.7,6.09 U4.32 ; U3.F5 U3.G5 ; U3.F5 U3.F4 ; U3.F5 U3.E6 ; U3.F5 U3.E5 ; U3.F5 U3.E4 ; U3.G5 U3.F4 ; U3.G5 31.71,20.15 31.62,20.07 ; U3.F4 U3.E4 ; U3.F4 U3.E3 ; U3.F4 U3.E5 ; U3.E6 U3.E5 ; U3.E6 U3.D5 ; U3.E5 v1(34.4,20.55) ; U3.E5 U3.D5 ; 29.47,40 v1(29.47,40.89) ; 41.4,23.77 41.2,23.57 C8.2 ; 41.4,23.77 v1(41.4,24) ; U3.E2 U3.D3 ; U3.E2 U3.E1 ; U3.E2 U3.E3 ; U3.D3 U3.E3 ; U3.D3 U3.C3 ; U3.D3 U3.D4 ; U3.D3 U3.E4 ; v1(27.18,36.83) 27.41,37.06 DN2.2 ; R14.2 v1(70.78,4.45) ; U3.C3 U3.B2 ; U3.C3 U3.C4 ; U3.C3 U3.B4 ; U3.C3 U3.C2 ; U3.C3 U3.B3 ; U3.C3 v1(35.2,21.36) U3.D4 ; U3.B2 U3.C2 ; U3.B2 U3.B3 ; v1(41.08,4.69) C14.2 ; v1(34.4,20.55) U3.E4 ; v1(34.4,20.55) U3.D5 ; v1(34.4,20.55) U3.D4 ; C16.2 62.48,17.47 62.3,17.65 v1(61.85,17.65) ; U3.E3 U3.E4 ; U3.E3 U3.D4 ; U3.C4 U3.B4 ; U3.C4 U3.D5 ; U3.C4 U3.D4 ; U3.C4 U3.C5 ; U3.C4 U3.B5 ; U3.C4 U3.B3 ; U3.E4 U3.D4 ; U3.B4 U3.B5 ; U3.B4 U3.B3 ; 28.21,19.89 C11.2 ; C11.2 29.08,20.59 ; C11.2 29.95,19.89 ; v1(24,36.2) 23.6,36.6 DN1.2 ; R13.2 v1(41.31,14.99) R12.2 ; C12.2 v1(41.22,18.8) 41.31,18.71 R11.2 ; C1.2 39.06,47.06 v1(38.86,46.86) ; U3.C2 U3.B3 ; 29.08,20.68 C10.2 ; C10.2 28.21,21.39 ; U3.D4 U3.C5 ; U3.D4 U3.D5 ; U3.C5 U3.D5 ; U3.C5 U3.B5 ; U2.2 22.73,19.68 23.37,19.05 v1(24.64,19.05) 25.34,19.76 C6.2 ; R4.2 13.72,46.99 v1(14.48,46.23) ; D3.2 v1(18.07,24.34) ; 56.51,8.12 v1(56.51,6.27) 56.51,4.74 ; SW1.2 v1(32.89,12.45) SW1.5 ; R3.2 v1(22.1,50.8) ; U3.A7 v1(37.96,18.55) ; C13.2 v1(50.35,2.54) ; U1.11 v2(34.8,44.45) ; C15.2 53.92,12.26 v1(53.34,11.68) 53.33,11.69 U4.16 ; C2.2 v1(39.88,41.6) ; v1(55.88,25.78) 56.16,25.5 56.16,25.42 57.02,24.56 J14.5 ; U5.2 v1(53.72,16.51)
  TOP w0.508: C7.2 v1(43.94,38.06) ; C7.2 v1(45.59,35.31) ; C7.2 v1(45.59,40.77) ; C7.2 v1(47.2,38.06) ; R10.2 v1(72.81,18.2) ; R9.2 v1(72.81,10.88)
  GPLANE w0.203: J18.A12 64.34,9.1 ; J18.A12 63.81,8.57 ; J18.A12 63.81,9.63 ; J18.B1 63.81,8.28 ; J18.B1 63.81,7.22 ; J18.B1 64.34,7.75 ; 13.31,5.95 SW2.3 ; SW2.3 12.23,7.02 ; SW2.3 13.31,8.1 ; SW2.3 14.39,7.02 ; 11.06,34.92 TP9.1 ; TP9.1 11.94,34.04 ; TP9.1 11.94,35.81 ; TP9.1 12.82,34.92 ; 12.23,12.03 SW2.1 ; SW2.1 13.31,13.1 ; SW2.1 14.39,12.03 ; SW2.1 13.31,10.95 ; TP13.1 51.94,51.05 ; TP13.1 52.82,50.16 ; TP13.1 51.06,50.16 ; TP13.1 51.94,49.28 ; TP10.1 12.82,41.27 ; TP10.1 11.94,42.16 ; TP10.1 11.94,40.39 ; TP10.1 11.06,41.27 ; 57.86,7.22 J18.B12 ; J18.B12 57.33,7.75 ; J18.B12 57.86,8.28 ; 64.4,24.77 TP12.1 ; TP12.1 66.16,24.77 ; TP12.1 65.28,25.65 ; TP12.1 65.28,23.88 ; 33.53,47.89 J6.1 ; J6.1 32.52,48.9 ; J6.1 34.53,48.9 ; J6.1 33.53,49.9 ; TP14.1 26.79,43.81 ; TP14.1 25.03,43.81 ; TP14.1 25.91,44.7 ; TP14.1 25.91,42.93 ; TP11.1 25.91,47.24 ; TP11.1 26.79,46.36 ; TP11.1 25.03,46.36 ; TP11.1 25.91,45.47 ; 57.33,9.1 J18.A1 ; J18.A1 57.86,8.57 ; J18.A1 57.86,9.63
  BOTTOM w0.203: 65.16,8.12 v1(65.16,6.19) 65.16,4.74
  vias: v1(30.48,20.57) v1(30.48,19.56)
V5: length 123.2
  TOP w0.203: 32.4,23.78 U3.G1 31.97,23.36 ; R1.1 18.29,48.9 v1(17.65,48.26) ; 29.08,22.36 C10.1 ; C10.1 29.95,23.06 ; C10.1 29.08,23.77 ; C10.1 28.21,23.06 ; TP15.1 11.3,49.91
  TOP w0.508: U3.F1 33.2,23.67 33.27,23.75 ; U3.F1 U3.G1 U3.G2 ; U3.F1 U3.F2 U3.G2 ; v1(49.66,19.3) 47.24,21.72 v1(47.24,22.61) ; R2.1 12.7,46.07 12.7,48.01 12.95,48.26 ; U1.4 39.31,44.45 C2.1 40,43.77 v1(40.77,43.77) ; U3.G2 31.83,22.55 31.75,22.48 ; 12.95,48.26 v1(17.65,48.26) ; 12.95,48.26 11.3,49.91
  BOTTOM w0.508: v1(47.24,22.61) 46.9,22.95 30.9,22.95 v1(30.86,22.99) 30.86,26.08 30.99,26.21 30.99,33.99 v1(40.77,43.77) 40.67,43.86 40.67,49.72 39.66,50.74 33.46,50.74 30.95,48.22 21.98,48.22 21.94,48.26 v1(17.65,48.26) ; v1(49.66,19.3) 68.83,19.3 70.99,17.14
VCC: length 53.2
  TOP w0.203: U4.17 52.19,13.02 C15.1 v1(52.51,14.17) ; v1(61.85,15.11) 62.37,15.11 62.65,15.39 62.65,15.59 63.11,16.06 C16.1 ; v1(42.49,4.77) C14.1 43.75,3.81 U4.1 ; 28.21,18.21 C11.1 ; C11.1 30.15,18.21 v1(30.61,18.67) ; C11.1 29.08,18.91 ; C11.1 29.08,17.51 ; v1(25.91,17.47) C6.1 25.45,17.89 U2.5 ; R8.2 v1(42.73,25.4) ; U3.G6 U3.F7 ; U3.G6 U3.F6 ; U3.G6 31.8,19.36 31.75,19.3 ; U3.G6 U3.G7 ; U3.F7 U3.F6 ; U3.F7 U3.E7 34,17.82 34.04,17.78 ; U3.F7 33.2,18.47 32.39,17.65 ; U3.F7 U3.G7 ; U3.F6 U3.G7 ; v1(39.37,50.04) 39.37,49.56 R5.2 ; U1.5 38.37,45.1 38.73,45.47 ; 38.73,45.47 39.69,45.47 C1.1 41.47,45.65 v1(41.53,45.59) ; 38.73,45.47 38.45,45.75 U1.6 ; U1.13 31.09,43.15 v1(30.73,42.8) ; J14.1 59.94,24.51 62.11,24.51 v1(62.23,24.38) ; U3.G7 31.97,18.55 ; U3.G7 32.4,18.13 ; v1(47.18,2.54) C13.1 47.9,2.7 U4.5 ; R7.1 28.96,48.9 v1(28.7,49.15)
  PPLANE w0.203: 16.38,49.28 TP16.1 ; TP16.1 17.26,50.16 ; TP16.1 16.38,51.05 ; TP16.1 15.5,50.16 ; J15.1 68.45,8.62 ; J15.1 68.45,6.62 ; J15.1 69.46,7.62 ; J15.1 67.45,7.62 ; 70.99,23.76 70.99,24.77 ; 70.99,24.77 69.99,24.77 ; 70.99,24.77 70.99,25.77 ; 70.99,24.77 72,24.77
  vias: v1(30.61,17.65)
A_IN: length 20.2
  TOP w0.203: U1.10 29.7,45.1 TP4.1 ; 27.18,39.92 26.46,40.64 C3.1 23.37,42.11 23.37,42.55 22.1,43.81 J1.2 ; 27.18,39.92 DN2.1 ; 27.18,39.92 v1(27.18,41.91)
  BOTTOM w0.203: TP4.1 27.18,45.09 v1(27.18,41.91)
B_IN: length 23.3
  TOP w0.203: DN1.1 24.95,38.63 C4.1 27.81,38.73 28.45,39.37 TP5.1 ; TP5.1 28.46,43.8 U1.12 ; TP5.1 27.18,45.09 21.46,45.09 J2.2
BUS_A: length 58.9
  TOP w0.203: L1.1 17.57,41.19 J4.1 TP6.1 12.7,39.5 7.85,39.5 J7.1 ; J9.2 3.05,26.52 J3.1
  TOP w0.508: J7.1 3.68,39.85 3.68,30.96 J3.1 6.5,29.97 22.91,29.97 L2.1
BUS_B: length 54.4
  TOP w0.203: J5.1 17.57,35.01 L1.4 ; J3.2 7.24,23.9 7.24,21.63 3.94,18.33 3.94,10.34 C5.1
  TOP w0.508: J7.2 11.15,38.25 TP7.1 J5.1 14.81,32.08 L2.3
  BOTTOM w0.508: J7.2 8.13,35.71 8.13,28.09 J3.2
INV: length 35.3
  TOP w0.203: R7.2 31.97,48.07 U1.8 30.87,47.5 v1(30.86,47.5) ; U2.1 24.27,20.21 v1(24.76,20.7)
  BOTTOM w0.203: v1(24.76,20.7) 30.48,26.42 30.48,42.28 30.19,42.57 30.19,43.03 30.48,43.32 30.48,47.12 v1(30.86,47.5)
RXD: length 61.5
  TOP w0.203: U4.9 51.13,6.09 50.62,6.6 v1(50.29,6.6) ; TP8.1 43.3,50.16 41.02,47.88 39.14,47.88 38.67,47.41 38.64,47.41 37.63,46.4 U1.7
  BOTTOM w0.203: v1(50.29,6.6) 50.42,6.73 50.42,9.91 49.02,11.3 49.02,37.08 52.58,40.64 52.58,46.36 50.67,48.26 46.23,48.26 TP8.1
RXE: length 55.8
  TOP w0.203: v1(47.88,7.49) 47.88,7.24 48.7,6.42 U4.6 ; J13.2 45.98,43.18 45.34,42.55 TP2.1 44.32,42.29 41.66,39.62 39.12,39.62 37.62,41.12 U1.1
  BOTTOM w0.203: v1(47.88,7.49) 48.03,7.65 48.03,9.31 48.01,9.34 48.01,9.41 47.93,9.48 47.93,38.78 48.01,38.85 48.01,39.49 48.03,39.52 48.03,41.17 J13.2
SW1: length 32.7
  TOP w0.203: U4.10 51.79,6.73 v1(53.34,6.73) ; v1(30.99,8) 30.35,8.64 SW1.6
  BOTTOM w0.203: v1(30.99,8) 34.04,4.95 40.26,4.95 40.55,5.24 40.89,5.24 40.96,5.32 42.71,5.32 42.95,5.08 51.69,5.08 v1(53.34,6.73)
SW2: length 36.5
  TOP w0.203: SW1.4 35.43,12.83 37.97,10.29 37.97,3.05 39.5,1.52 40.14,1.52 40.37,1.3 51.58,1.3 51.8,1.52 52.04,1.52 54.37,3.85 54.37,7.15 54.03,7.49 51.83,7.49 U4.11
SW3: length 20.6
  TOP w0.203: v1(45.34,7.87) 46.22,8.75 51.37,8.75 U4.12 ; SW1.3 35.43,8 v1(36.2,8.76)
  BOTTOM w0.203: v1(36.2,8.76) 37.34,7.62 44.32,7.62 44.58,7.87 v1(45.34,7.87)
SW4: length 25.8
  TOP w0.203: v1(45.21,9.53) 45.45,9.29 U4.13 ; v1(30.35,6.73) SW1.1
  BOTTOM w0.203: v1(45.21,9.53) 44.58,10.16 32.16,10.16 30.34,8.34 30.34,6.74 v1(30.35,6.73)
TXD: length 65.5
  TOP w0.203: TP1.1 43.3,47.62 42.42,46.74 42.42,44.28 40.64,42.5 40.64,41.22 40.44,41.02 39.37,41.02 38.99,41.4 38.99,43.05 38.24,43.8 U1.3 ; v1(49.4,8) 49.4,6.72 50.3,5.83 U4.8
  BOTTOM w0.203: TP1.1 50.67,47.62 51.94,46.36 51.94,41.78 48.64,38.48 48.64,9.78 49.4,9.02 v1(49.4,8)
TXE: length 60.3
  TOP w0.203: J13.1 45.98,45.72 45.34,45.09 TP3.1 44.32,44.07 40.92,40.67 39.22,40.67 38.63,41.25 38.63,42.77 38.26,43.15 U1.2 ; U4.7 49.5,6.12 48.77,6.85 v1(48.77,7.49)
  BOTTOM w0.203: v1(48.77,7.49) 48.77,9.08 48.36,9.49 48.36,9.56 48.29,9.63 48.29,38.63 48.36,38.7 48.36,39.34 51.31,42.29 51.31,44.45 J13.1
USB_DM: length 27.5
  TOP w0.247: v1(61.85,15.88) 61.47,15.88 60.84,16.5 54.52,16.5 53.96,15.94 53.49,15.94 53.46,15.97 53.37,15.97 53.33,16.01 U5.1 U5.6 50.58,16.01 50.54,15.97 50.17,15.97 50.15,15.94 49.68,15.94 49.37,16.24 47.8,16.24 46.9,15.34 46.9,14.25 47.1,14.05 U4.21
  BOTTOM w0.247: J18.B7 60.41,7.96 61.26,8.81 J18.A7 61.26,9.6 61.11,9.75 61.11,15.54 61.44,15.88 v1(61.85,15.88)
USB_DP: length 28.8
  TOP w0.247: U4.22 46.3,14.05 46.5,14.25 46.5,15.51 47.63,16.64 49.24,16.64 49.68,17.08 50.15,17.08 50.17,17.05 50.54,17.05 50.58,17.01 U5.4 U5.3 53.33,17.01 53.37,17.05 53.46,17.05 53.49,17.08 53.96,17.08 54.13,16.9 v1(61.85,16.9) ; J18.A6 60.41,8.81 61.26,7.96 J18.B6
  BOTTOM w0.247: v1(61.85,16.9) 61.85,16.84 60.71,15.7 60.71,9.9 60.41,9.6 J18.A6
VRAW: length 33.2
  TOP w0.508: J8.2 33.57,32.39 RT1.2 43.69,31.15 C7.1 45.59,25.33 C9.1 C8.1 40.11,21.76 U3.A3 U3.A4 U3.A5
XMIT: length 58.1
  TOP w0.203: U4.18 49.66,12.86 v1(49.66,11.81) ; v1(53.72,4.06) 53.72,3.94 51.43,1.65 40.51,1.65 40.04,2.12 40.03,2.12 39.71,2.44 39.71,2.45 38.61,3.56 38.61,13.59 36.58,15.62 29.4,15.62 SW2.2 SW2.4
  BOTTOM w0.203: v1(49.66,11.81) 53.97,7.49 53.97,4.27 53.77,4.06 v1(53.72,4.06)
N00354: length 6.8
  TOP w0.203: R12.1 39.38,13.97 U3.D7
N00391: length 5.2
  TOP w0.203: U3.C7 38.28,15.88 R13.1
N00494: length 3.5
  TOP w0.203: U3.B6 U3.A6 39.48,19.36 C12.1
N00628: length 3.6
  TOP w0.203: U3.B7 37.17,17.78 R11.1
N06582: length 0.8
  TOP w0.203: U3.C6 U3.D6
N44102: length 35.7
  TOP w0.508: L2.2 26.21,29.21 D2.2 24.44,21.72 22.61,21.72 21.78,20.89 U2.3 21.39,19.81 13.32,19.81 D3.4 12.15,20.15 5.59,13.59 J10.2
N44111: length 43.9
  TOP w0.203: v1(20.32,18.54) 20.97,17.89 U2.4
  TOP w0.508: L2.4 12.32,26.09 12.32,23.64 D3.3 ; D3.3 13.48,23.47 14.48,22.48 20.78,22.48 D2.1 ; D3.3 5.59,16.91 J10.1
  BOTTOM w0.203: v1(20.32,18.54) 7.77,18.54 J10.1
N44224: length 29.7
  TOP w0.508: RT1.1 33.57,34.92 J8.1 ; D3.1 v1(15.98,20.98)
  BOTTOM w0.508: v1(15.98,20.98) 15.98,25.25 25.65,34.92 J8.1
N46803: length 12.1
  TOP w0.203: U1.14 v1(31.97,41.69) ; R5.1 J6.2
  BOTTOM w0.203: v1(31.97,41.69) 31.97,44.8 J6.2
N47498: length 4.5
  TOP w0.203: J2.1 15.91,46.36 R4.1 R2.2
N47631: length 9.1
  TOP w0.203: R3.1 20.99,49.21 R1.2 20.83,48.9 18.92,46.99 v1(18.92,45.09) J1.1
N50317: length 4.6
  TOP w0.508: J11.2 66.63,15.33 R9.1
N50410: length 4.6
  TOP w0.508: R10.1 66.63,22.95 J12.2
N62411: length 6.2
  TOP w0.203: C4.2 23.16,38.57 22.64,38.05 22.47,38.05 22.03,37.6 L1.3 20.19,37.52 J5.2
N62421: length 5.8
  TOP w0.203: 20.27,41.19 J4.2 ; 20.27,41.19 L1.2 ; 20.27,41.19 20.83,40.64 C3.2
N63315: length 2.6
  TOP w0.203: R6.1 6.43,9.25 C5.2
N63319: length 19.8
  TOP w0.203: J9.1 3.05,19.05 3.05,6.98 3.67,6.37 5.1,6.37 6.35,7.62 R6.2
N73563: length 5.6
  TOP w0.203: U3.C1 37.64,25.4 R8.1
N86511: length 27.9
  TOP w0.203: U4.23 45.5,16.29 46.99,17.78 60.96,17.78 62.61,19.43 62.61,22.35 62.48,22.48 59.94,22.48 J14.2
N86521: length 38.8
  TOP w0.203: v1(45.47,22.1) 45.47,23.88 49.53,27.94 58.29,27.94 59.18,27.05 59.18,25.02 J14.3 ; v1(46.1,7.11) 47.1,6.12 U4.4
  BOTTOM w0.203: v1(46.1,7.11) 46.1,21.46 v1(45.47,22.1)
N86531: length 23.4
  TOP w0.203: J14.4 59.31,21.84 59.31,18.92 58.55,18.16 46.48,18.16 44.7,16.38 44.7,13.03 U4.24
N86555: length 25.8
  TOP w0.203: J14.6 56.39,23.5 47.22,23.5 46.61,22.89 46.61,20.19 42.04,15.62 42.04,11.43 42.58,10.89 U4.26
N86603: length 43.1
  TOP w0.203: R14.1 69.26,5.89 70.99,7.62 ; U4.31 42.58,6.89 40.9,5.21 40.65,5.21 39.88,4.45 39.88,3.05 v1(40.26,2.67)
  BOTTOM w0.203: 70.99,7.62 66.8,3.43 41.02,3.43 v1(40.26,2.67)
N95055: length 23
  TOP w0.203: U5.5 v1(49.91,16.51) ; J18.A4 J18.B9
  BOTTOM w0.203: J18.A9 J18.B4 62.96,7.59 62.36,6.98 59.18,6.98 58.71,7.46 J18.B9 ; v1(49.91,16.51) 52.93,16.51 53.45,15.99 53.47,15.99 53.49,15.96 53.76,15.96 56.39,13.34 57.78,13.34 58.8,12.32 58.8,9.19 J18.A4
N97303: length 13.5
  TOP w0.203: v1(44.96,10.79) 44.58,10.41 44.58,8.44 44.35,8.22 44.35,8.18 44.12,7.95 44.09,7.95 43.82,7.69 U4.30
  BOTTOM w0.203: v1(44.96,10.79) 44.96,18.41 TP22.1
N97309: length 3.7
  TOP w0.203: U4.29 42.65,8.49 TP21.1
N97315: length 3
  TOP w0.203: U4.28 40.91,9.29 TP20.1
N97321: length 3.4
  TOP w0.203: U4.27 41.85,10.09 TP19.1
N97327: length 7.1
  TOP w0.203: TP18.1 57.02,14.35 53.56,10.89 U4.15
N97333: length 6.2
  TOP w0.203: TP17.1 55.05,10.09 U4.14

## Copper pours and planes (outline as drawn; the poured copper is in the pictures)
GND on TOP: 27.81,22.23 33.65,22.23 33.65,24 34.42,24 34.42,22.99 36.7,22.99 36.7,19.81 36.58,19.68 34.42,19.68 34.42,18.92 33.65,18.92 33.65,19.81 31.37,19.81 30.61,19.05 27.81,19.05
GND on GPLANE: 0.51,73.66 1.1,75.1 2.54,75.69 73.66,75.69 75.1,75.1 75.69,73.66 75.69,2.54 75.1,1.1 73.66,0.51 2.54,0.51 1.1,1.1 0.51,2.54
V5 on TOP: 27.81,24 27.81,22.23 33.65,22.23 33.65,24
VCC on TOP: 27.81,19.05 30.61,19.05 31.37,19.81 33.65,19.81 33.65,18.92 34.42,18.92 34.42,17.27 27.81,17.27
VCC on PPLANE: 0.51,73.66 1.1,75.1 2.54,75.69 73.66,75.69 75.1,75.1 75.69,73.66 75.69,2.54 75.1,1.1 73.66,0.51 2.54,0.51 1.1,1.1 0.51,2.54

## Text on the board
Ref Des/Silkscreen Top: TERM | FAST | BUS | PWR | TRANSMIT | BITRATE | JTAG
PLACE_BOUND_TOP: FIGURE | FINISHED_SIZE | 10.0 | 15.46 | 25.0 | 33.86 | 41.34 | 43.31 | 47.24 | 51.18 | 38.98 | 70.87 | 93.7 | 55.12x23.62 | 82.68x23.62 | DRILL CHART: TOP to BOTTOM | ALL UNITS ARE IN MILS | ROTATION | - | 90.000 | PLATED | NON-PLATED | QTY | 82 | 16 | 1 | 2 | 274 | 22 | 4 | 6 | 3
